# Altium PCB DIY_EINK_Gadget.PcbDoc
Units mm, origin at the board's own origin, x right, y up, seen from the top; angles counter-clockwise.
Board outline 45 x 45 mm, 2 copper layers (Top Layer, Bottom Layer), stack 0.971 mm thick; 65 components, 51 nets, 226 pads, 92 vias.
Unrouted connection lines stored in the file: 13.
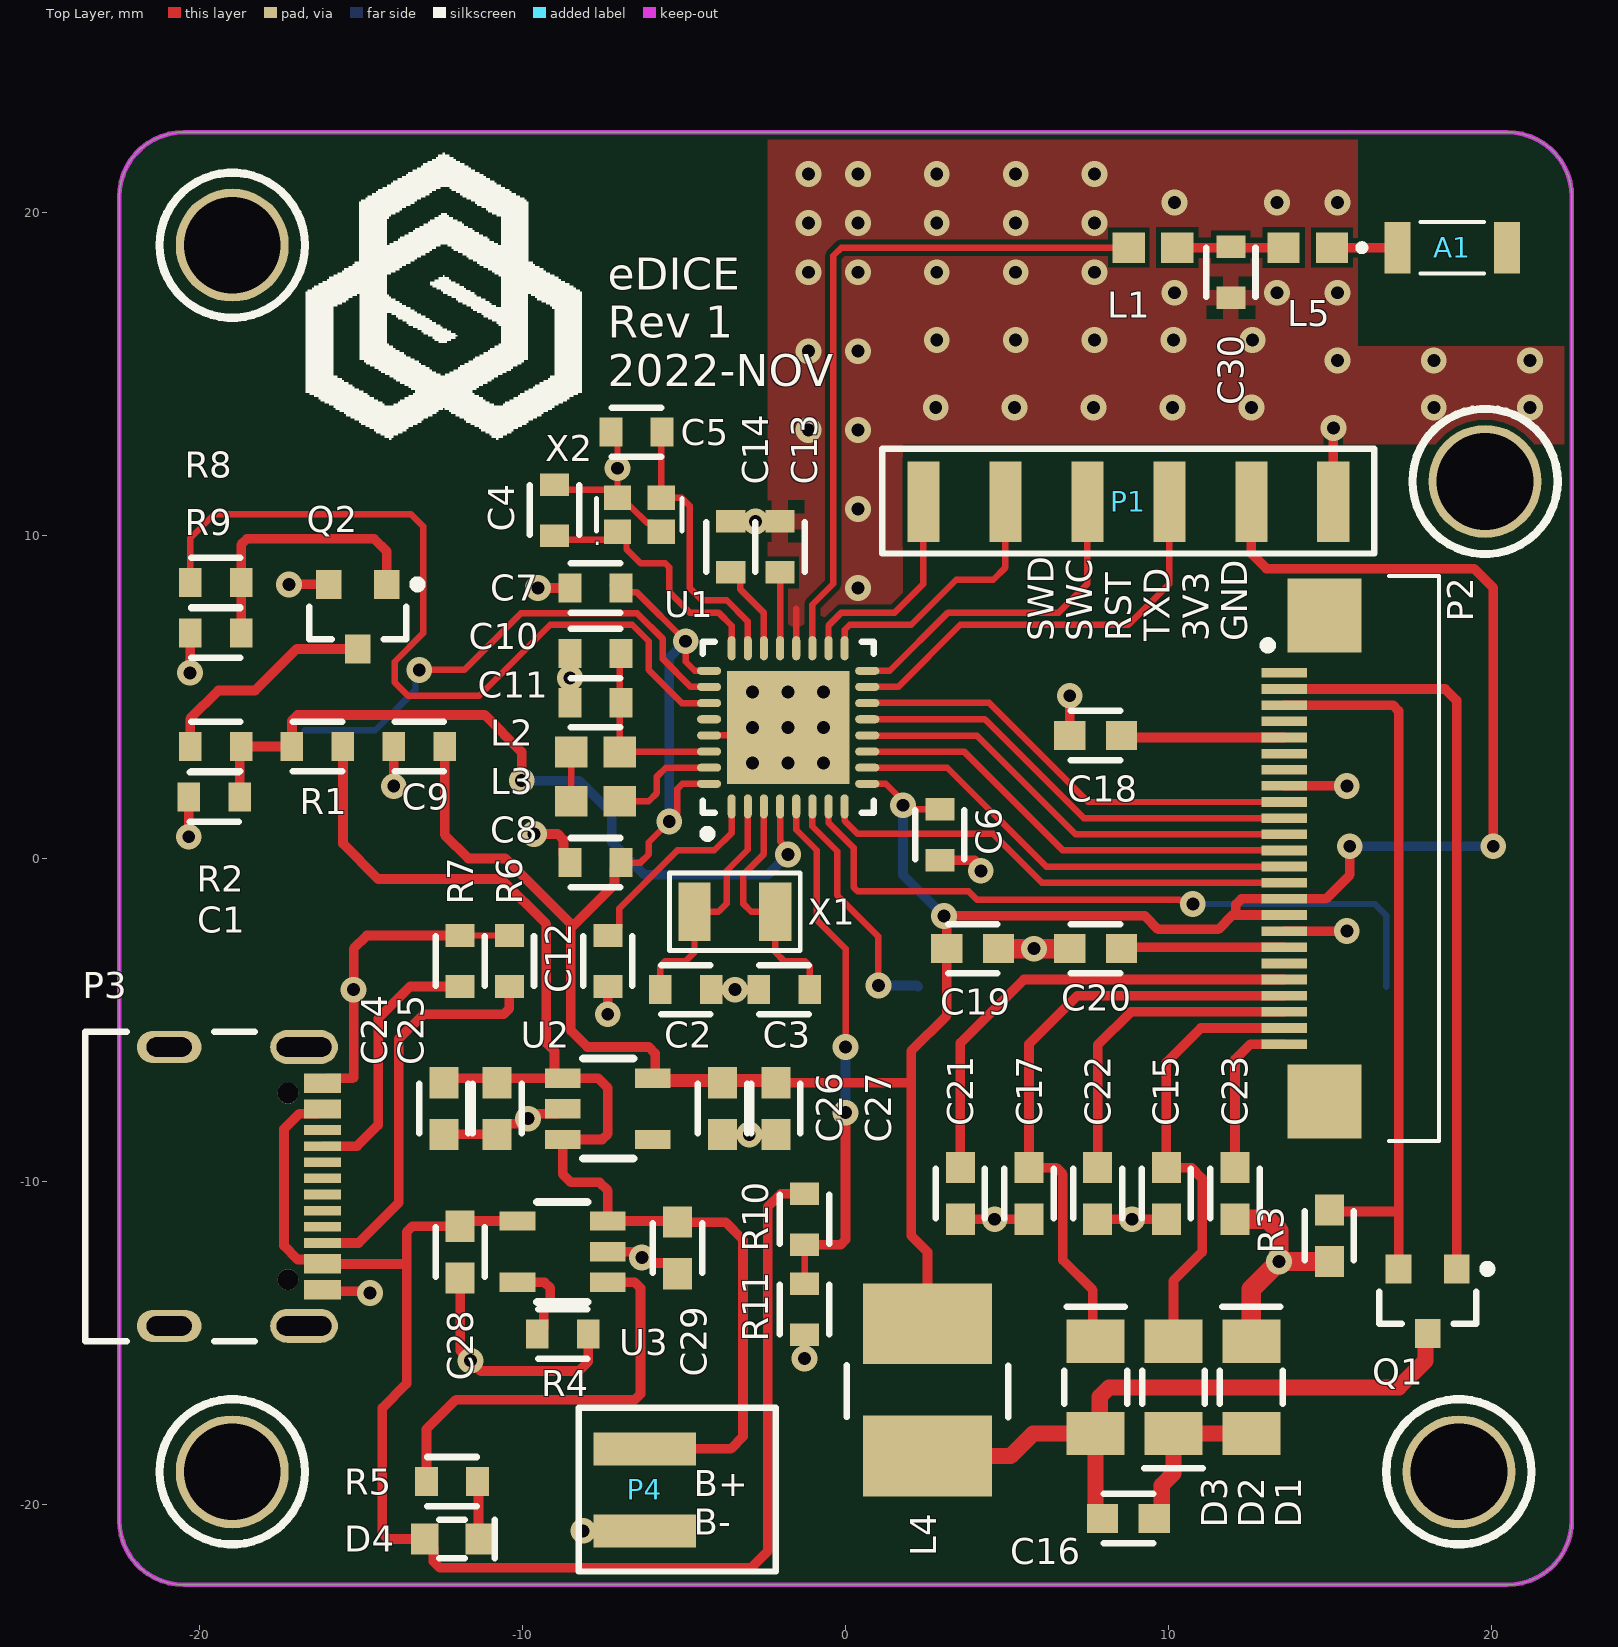
[diagram p0: Top Layer view]
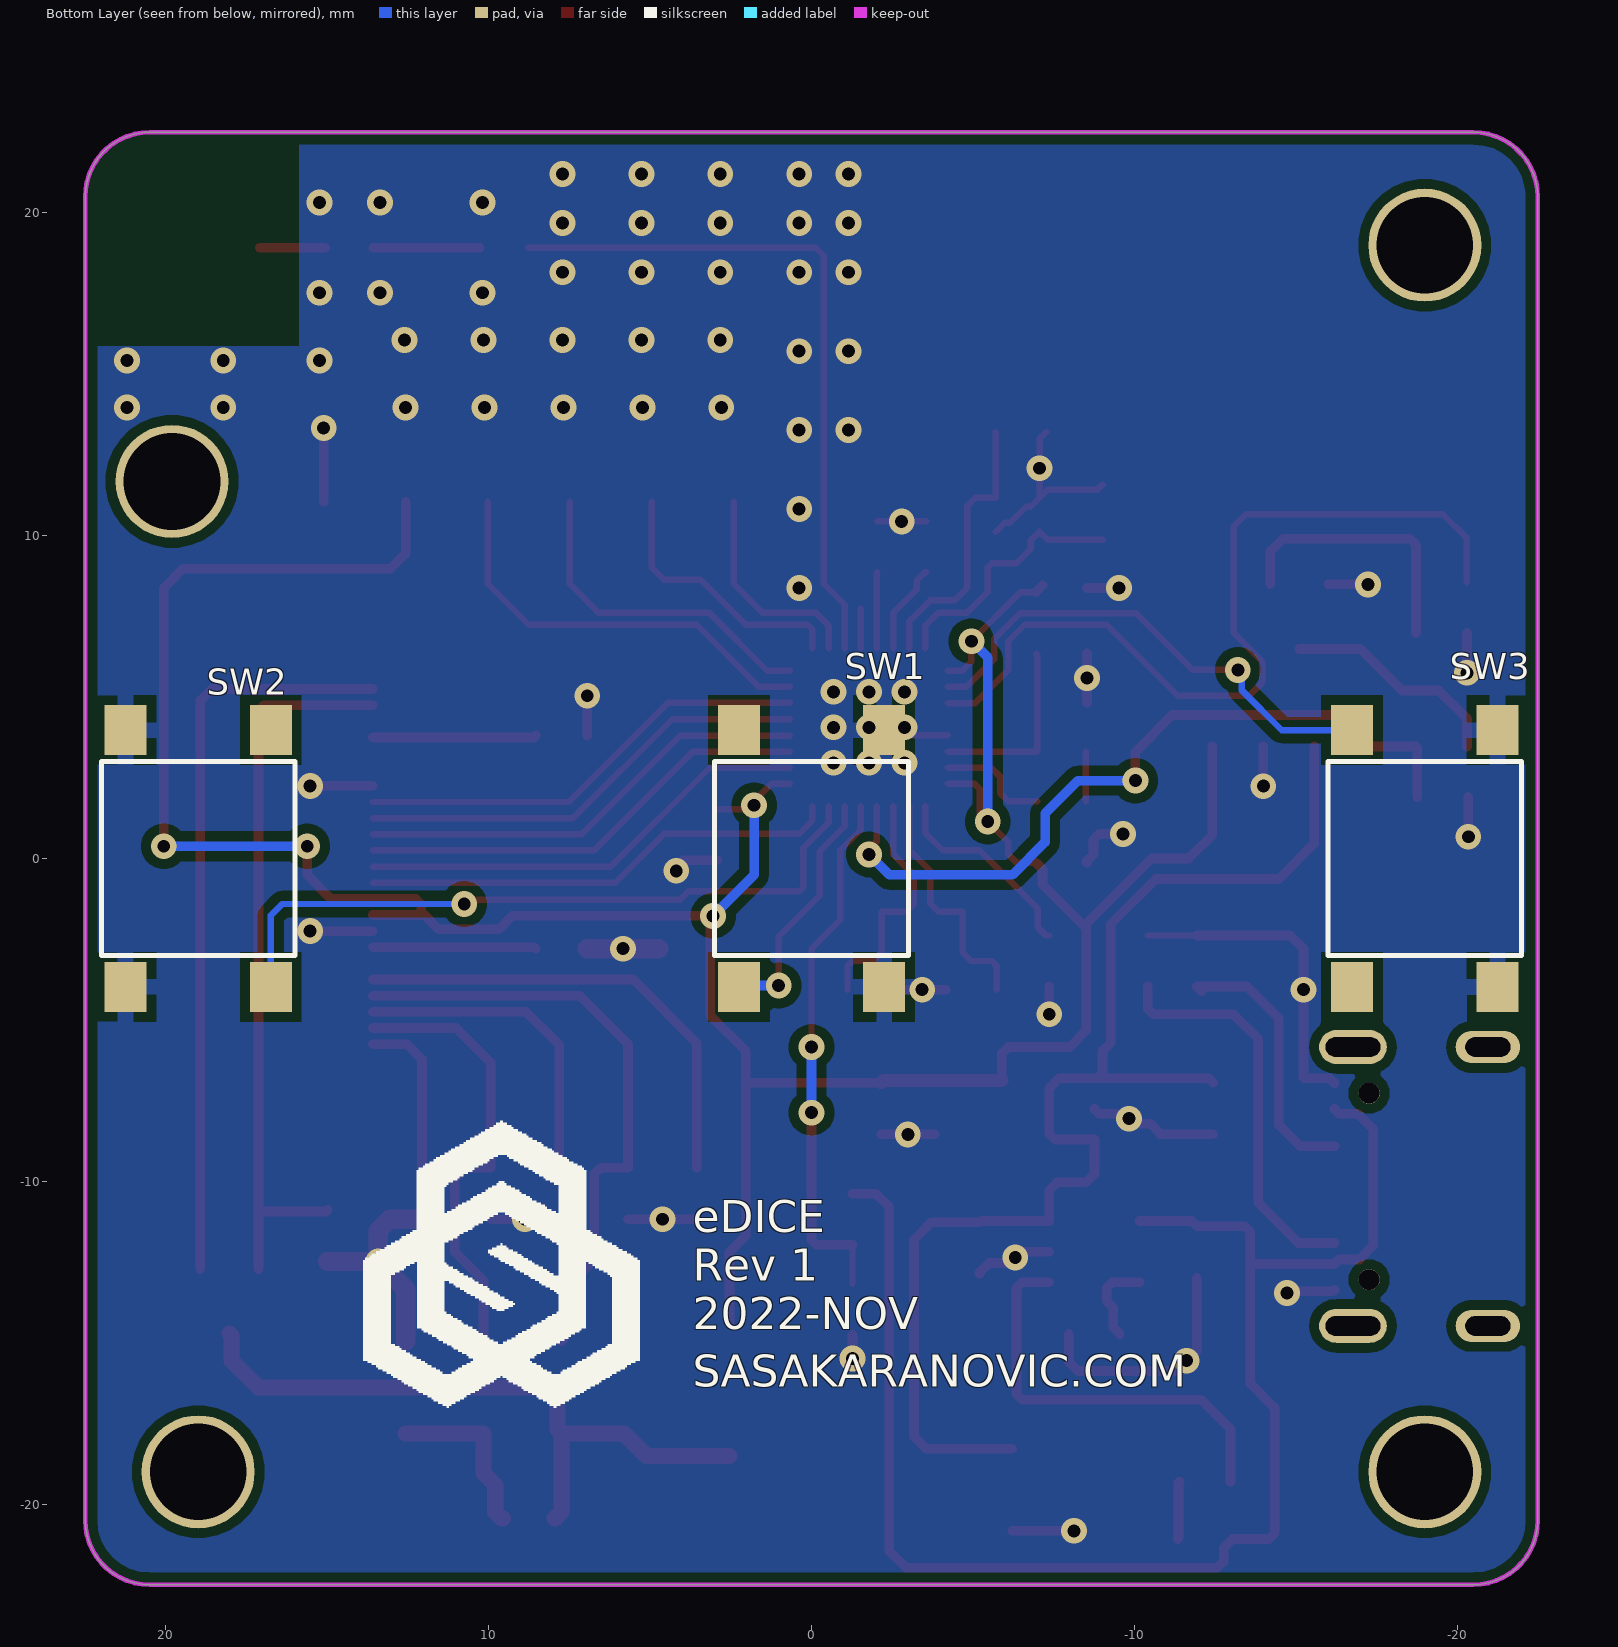
[diagram p1: Bottom Layer view, seen from below]
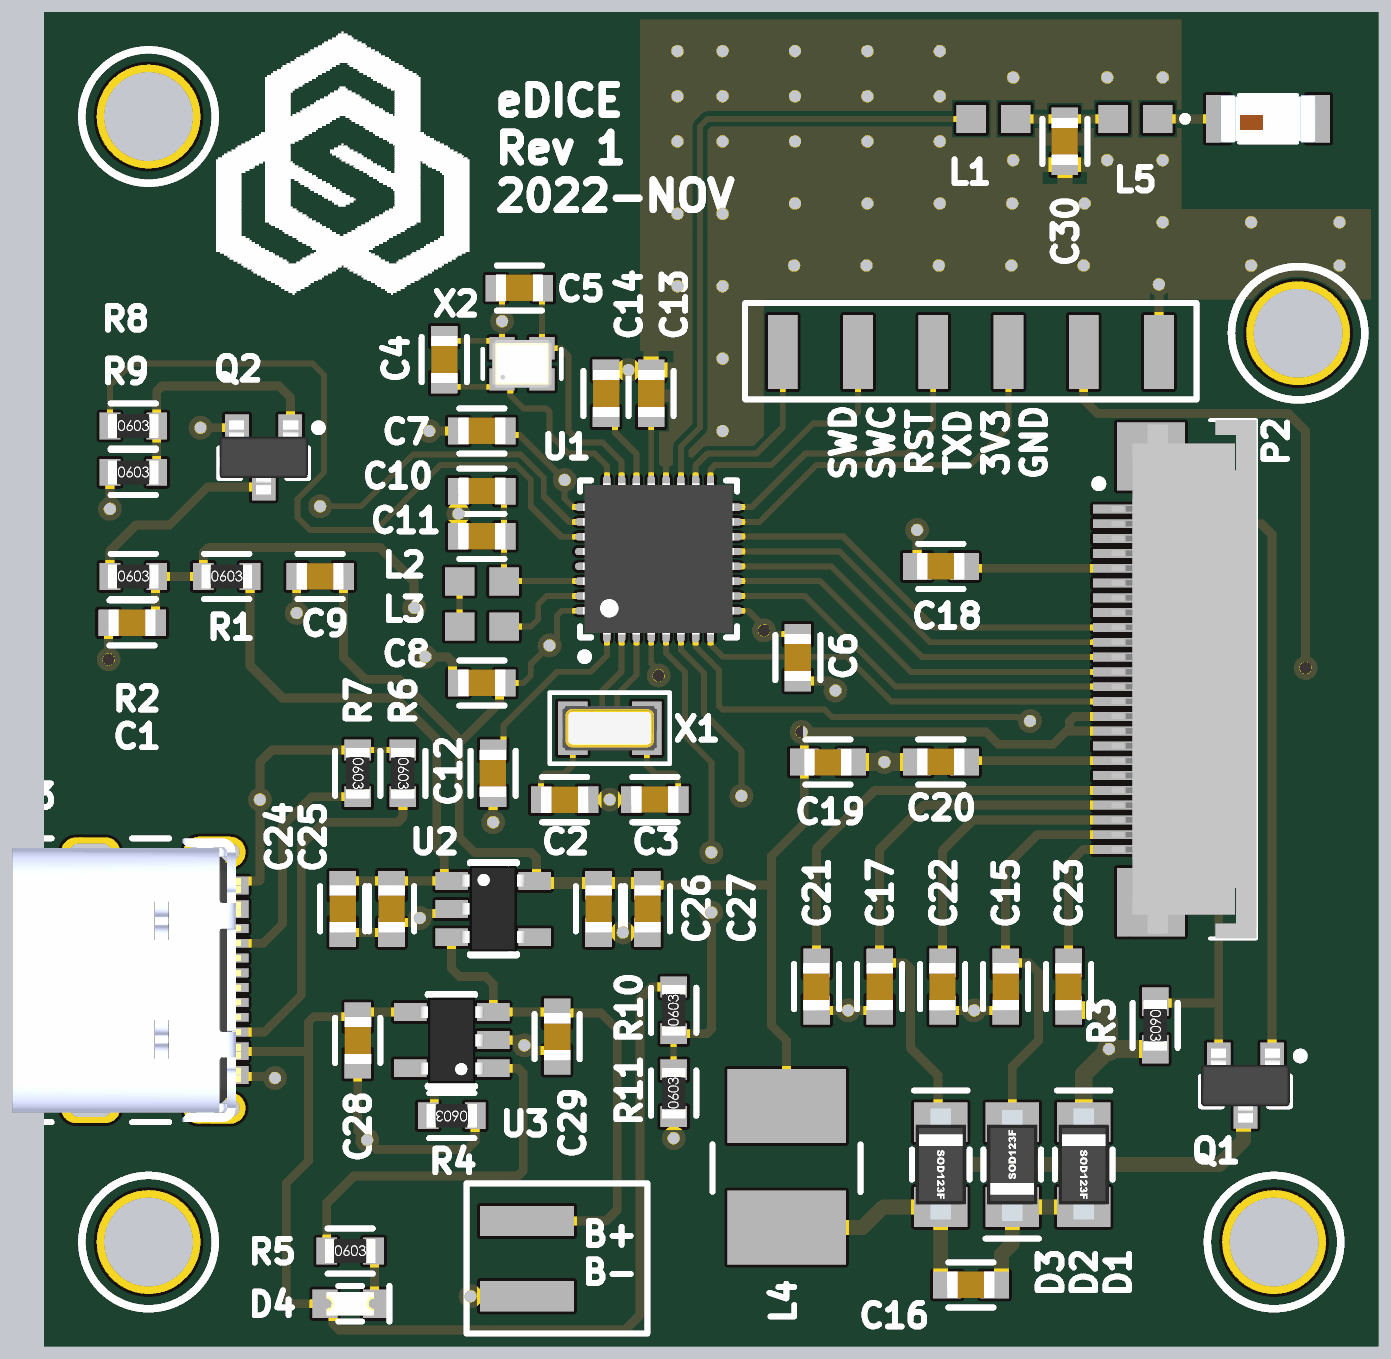
[diagram p2: 3D render of the assembled board from above, using the file's embedded part models]
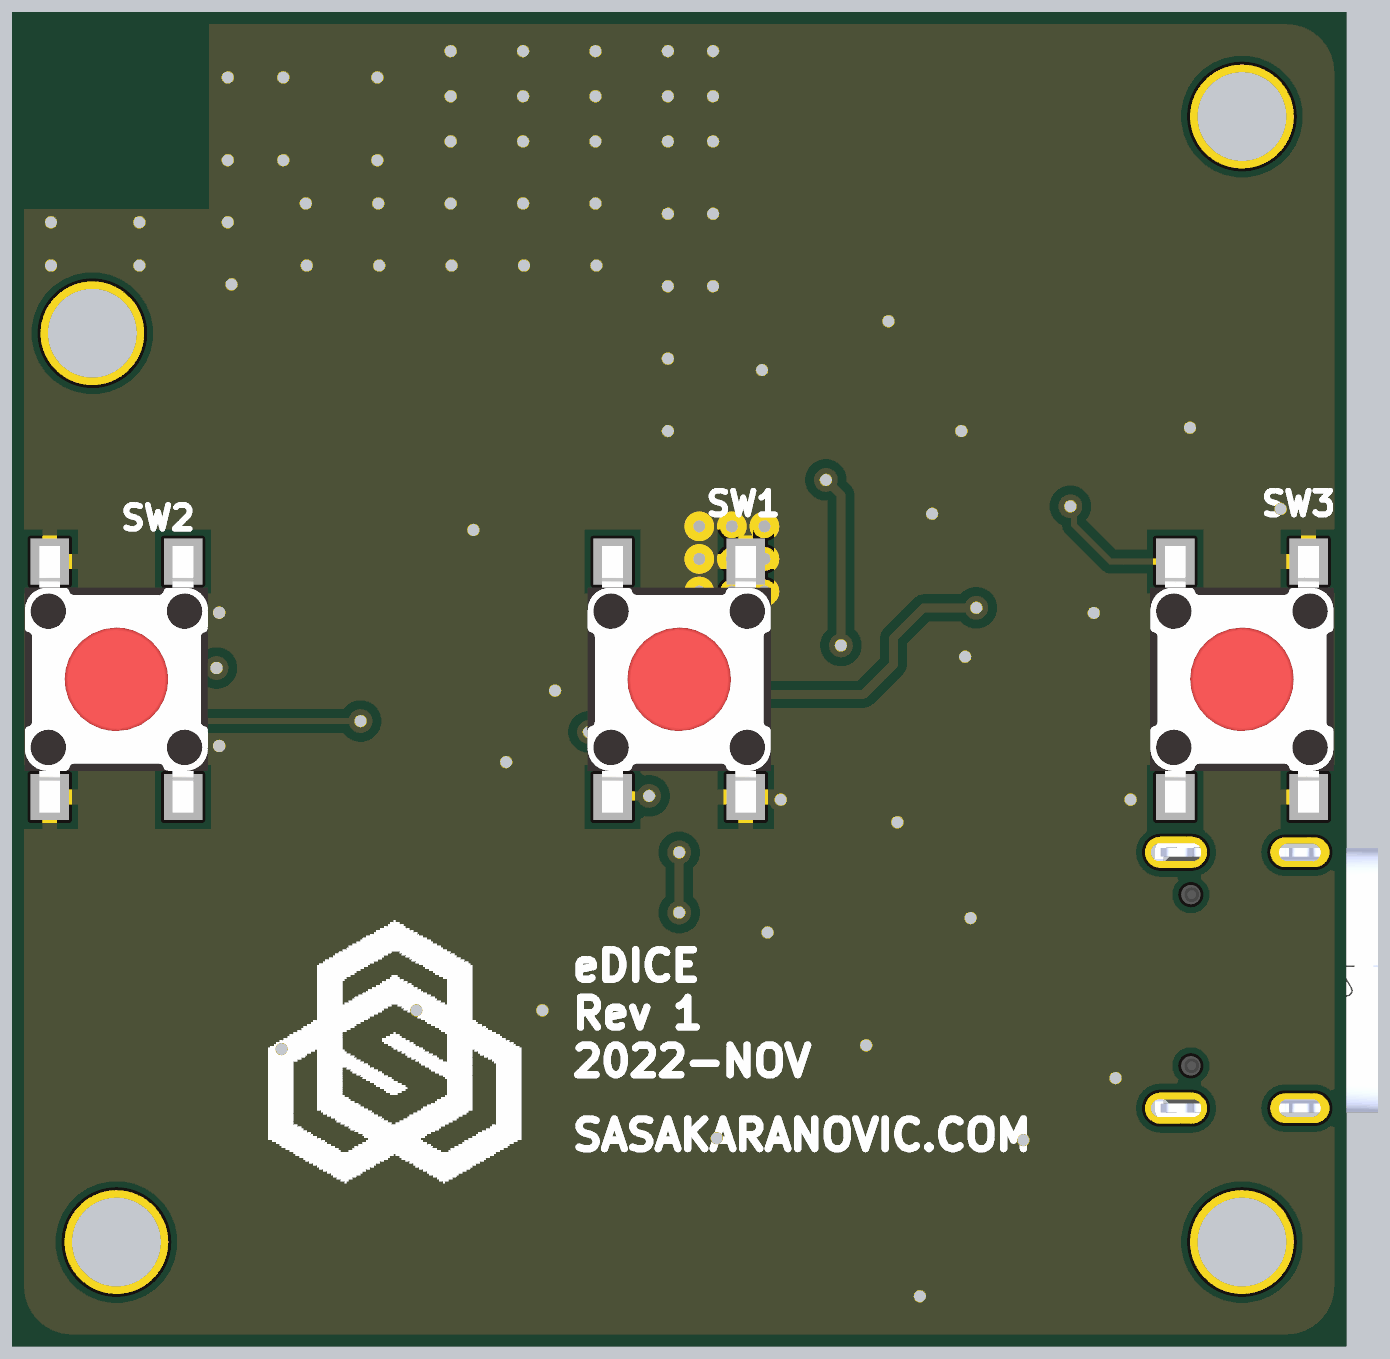
[diagram p3: 3D render of the assembled board from below, using the file's embedded part models]

## Layer stack, top to bottom
Top Solder: solder mask 0.0102, Solder Resist, Dk 3.5
Top Layer: signal copper 0.0356
Dielectric 1: dielectric 0.9, FR-4, Dk 4.8
Bottom Layer: signal copper 0.0356
Bottom Solder: solder mask 0.0102, Solder Resist, Dk 3.5

## Board outline
-20.5,-22.5 cw(c-20.5,-20.5) -22.5,-20.5 -22.5,20.5 cw(c-20.5,20.5) -20.5,22.5 20.5,22.5 cw(c20.5,20.5) 22.5,20.5 22.5,-20.5 cw(c20.5,-20.5) 20.5,-22.5

## Design rules (kind name [scope] priority, off if disabled: settings)
Clearance Clearance_1 [InNamedPolygon('GND_L02_P000')] p1: gap=0.3 ignorepadtopadclearanceinfootprint=FALSE
Clearance [All] p2: gap=0.152 ignorepadtopadclearanceinfootprint=FALSE
Height [All] p1 off: minheight=0 maxheight=25.4 prefheight=12.7
HoleSize [All] p1: absolutevalues=TRUE maxlimit=55 minlimit=0.3 maxpercent=80.000 minpercent=20.000
MinimumSolderMaskSliver [All] p1 off: minsoldermaskwidth=0.254
PolygonConnect [All] p1: thpad.connectstyle=Relief thpad.reliefconductorwidth=0.8 thpad.reliefentries=4 thpad.polygonreliefangle="90 Angle" thpad.airgapwidth=0.5 smdpad.connectstyle=Relief smdpad.reliefconductorwidth=0.5 smdpad.reliefentries=4 smdpad.polygonreliefangle="90 Angle" smdpad.airgapwidth=0.3 via.connectstyle=Direct via.reliefconductorwidth=0.254 via.reliefentries=4 via.polygonreliefangle="90 Angle" via.airgapwidth=0.254
RoutingVias [All] p1: holewidth=0.4 width=0.8 viastyle="Through Hole" minholewidth=0.4 minwidth=0.6 maxholewidth=50 maxwidth=100
SilkToSilkClearance [All] p1 off: silktosilkclearance=0.254
SilkToSolderMaskClearance [IsPad] p1 off: minsilkscreentomaskgap=0.254 clearancetoexposedcopper=TRUE
SolderMaskExpansion [All] p1: expansion=0.102 istentingtop=FALSE
Width [All] p1: maxlimit=50 minlimit=0.15 preferedwidth=0.5
25 further rules are at their usual default settings.

## Components (designator, comment, footprint, x,y, rotation, side; value= is the part's Value field where it differs from the comment)
A1 "2450AT18B100E" 2450AT18B100 18.796,18.923 r0 top
C1 "Cap" "0603 - CAP" -19.558,1.905 r0 top value=DNP
C2 "Cap" "0603 - CAP" -4.953,-4.064 r180 top value=8p
C3 "Cap" "0603 - CAP" -1.905,-4.064 r0 top value=8p
C4 "Cap" "0603 - CAP" -9.017,10.795 r270 top value=8p
C5 "Cap" "0603 - CAP" -6.477,13.208 r0 top value=8p
C6 "Cap" "0603 - CAP" 2.921,0.734 r90 top value=100n
C7 "Cap" "0603 - CAP" -7.747,8.382 r0 top value=100n
C8 "Cap" "0603 - CAP" -7.747,-0.127 r0 top value=100n
C9 "Cap" "0603 - CAP" -13.208,3.472 r0 top value=4.7u
C10 "Cap" "0603 - CAP" -7.747,6.35 r0 top value=DNP
C11 "Cap" "0603 - CAP" -7.747,4.826 r0 top value=1u
C12 "Cap" "0603 - CAP" -7.366,-3.175 r90 top value=100n
C13 "Cap" "0603 - CAP" -2.032,9.652 r270 top value=DNP
C14 "Cap" "0603 - CAP" -3.556,9.652 r270 top value=100p
C15 "Cap" "0603 - CAP HS" 9.938,-10.376 r270 top value=1u
C16 "Cap" "0603 - CAP HS" 8.763,-20.447 r0 top value=1u
C17 "Cap" "0603 - CAP HS" 5.683,-10.376 r270 top value=1u
C18 "Cap" "0603 - CAP HS" 7.747,3.81 r0 top value=1u
C19 "Cap" "0603 - CAP HS" 3.937,-2.794 r180 top value=1u
C20 "Cap" "0603 - CAP HS" 7.747,-2.794 r0 top value=1u
C21 "Cap" "0603 - CAP HS" 3.556,-10.376 r90 top value=1u
C22 "Cap" "0603 - CAP HS" 7.81,-10.376 r90 top value=1u
C23 "Cap" "0603 - CAP HS" 12.065,-10.376 r90 top value=470n
C24 "Cap" "0603 - CAP HS" -12.446,-7.747 r270 top value=4.7u
C25 "Cap" "0603 - CAP HS" -10.795,-7.747 r270 top value=100n
C26 "Cap" "0603 - CAP HS" -3.81,-7.747 r270 top value=4.7u
C27 "Cap" "0603 - CAP HS" -2.159,-7.747 r270 top value=100n
C28 "Cap" "0603 - CAP HS" -11.938,-12.192 r270 top value=4.7u
C29 "Cap" "0603 - CAP HS" -5.207,-12.065 r270 top value=4.7u
C30 "Cap" "0603 - CAP" 11.938,18.161 r90 top value=DNP
D1 "Diode Schotky" SOD123F 12.573,-16.383 r90 top
D2 "Diode Schotky" SOD123F 10.16,-16.383 r270 top
D3 "Diode Schotky" SOD123F 7.747,-16.383 r90 top
D4 "LED" "0603 Diode" -12.192,-21.082 r0 top
L1 "Inductor" 0603_IND 9.525,18.923 r0 top value=0R
L2 "Inductor" 0603_IND -7.747,3.302 r180 top value=10uH
L3 "Inductor" 0603_IND -7.747,1.778 r0 top value=3.9nH
L4 "Inductor" IND_5050 2.54,-16.51 r270 top value=47uH
L5 "Inductor" 0603_IND 14.32,18.923 r0 top value=0R
P1 "ICSP" "Header 6x1 M - 90Deg - SMT" 8.763,11.049 r0 top locked
P2 "HINK-E013A02" SFV24R-1STE1HLF 13.589,0 r270 top locked
P3 "USB-C Recepticle" GCT_USB4105-GF-A -20.955,-10.16 r270 top locked
P4 "Battery Connector" "Header 2x1 SMD" -6.223,-18.288 r270 top
Q1 "DMN62D0U-13" SOT90P240X100-3N 18.034,-13.716 r270 top
Q2 "DMN62D0U-13" SOT90P240X100-3N -15.113,7.493 r270 top
R1 "Res" 0603 -16.362,3.472 r0 top value=DNP
R2 "Res" 0603 -19.515,3.472 r0 top value=DNP
R3 "Res" "0603 - HS" 14.986,-11.684 r270 top value=2R2
R4 "Res" 0603 -8.763,-14.732 r180 top value=22K
R5 "Res" 0603 -12.192,-19.304 r0 top value=470R
R6 "Res" 0603 -10.414,-3.175 r270 top value=5K1
R7 "Res" 0603 -11.938,-3.175 r270 top value=5K1
R8 "Res" 0603 -19.515,8.552 r0 top value=DNP
R9 "Res" 0603 -19.515,6.985 r0 top value=DNP
R10 "Res" 0603 -1.27,-11.176 r90 top value=68K
R11 "Res" 0603 -1.27,-13.97 r90 top value=100K
SW1 "SWITCH TACTILE SPST-NO 0.05A 12V" PTS645 0,0 r90 bottom
SW2 "SWITCH TACTILE SPST-NO 0.05A 12V" PTS645 19,0 r270 bottom
SW3 "SWITCH TACTILE SPST-NO 0.05A 12V" PTS645 -19,0 r90 bottom
U1 "NRF52810-QCAA-R" QFN50P500X500X100_HS-33N -1.778,4.064 r90 top
U2 "TPS7A0333DBVR" SOT-23-5 -7.366,-7.747 r0 top
U3 "MCP73832T" SOT-23-5 -8.763,-12.192 r180 top
X1 "32.768KHz" XTAL-2LEAD-3215 -3.429,-1.651 r0 top
X2 "32.00MHz" XTAL-4LEAD-2016 -6.39,10.651 r0 top

## Footprints (in the part's own frame and the unit in brackets; to place one, negate y for a bottom-side part, rotate by r counter-clockwise, add the part's x,y. Pads: shape width x height; smd on the part's side, far side on the other; paste and mask are expansions set on the pad)
0603 [mm]
  rect 0.7x0.9 smd: 1(-0.79,0) 2(0.79,0)
  silkscreen extent -0.76,-0.76 0.76,0.76, body extent -0.85,-0.4 0.85,0.4, height 0.56
"0603 - CAP" [mm]
  rect 0.7x0.9 smd: 1(-0.79,0) 2(0.79,0)
  silkscreen extent -0.76,-0.76 0.76,0.76, body extent -0.8,-0.44 0.8,0.46, height 0.8
"0603 - CAP HS" [mm]
  rect 0.965x0.9 smd: 1(-0.8,0) 2(0.8,0)
  silkscreen extent -0.76,-0.76 0.76,0.76, body extent -0.8,-0.44 0.8,0.46, height 0.8
"0603 - HS" [mm]
  rect 0.965x0.9 smd: 1(-0.8,0) 2(0.8,0)
  silkscreen extent -0.76,-0.76 0.76,0.76, body extent -0.85,-0.4 0.85,0.4, height 0.56
"0603 Diode" [mm] "0603 Package for Diode"
  rect 0.85x0.95 smd: A(-0.85,0) K(0.85,0)
  silkscreen extent -0.4,-0.6 1.32,0.6, body extent -0.8,-0.4 0.8,0.4, height 0.7
0603_IND [mm] "Chip Inductor, 2-Leads, Body 1.60x0.80mm, IPC Medium Density"
  rect 1x0.95 smd: 1(-0.75,0) 2(0.75,0)
  body extent -0.85,-0.45 0.85,0.45, height 0.9
2450AT18B100 [mm]
  rect 0.8x1.6 smd: 1(-1.7,0) 2(1.7,0)
  silkscreen extent -2.9,-0.8 0.98,0.8, body extent -1.6,-0.8 1.6,0.8, height 1.4
GCT_USB4105-GF-A [mm]
  oval 1x2 hole 0.6 slot 1.4 at 90 deg: 15(-4.32,0) 17(4.32,0)
  oval 1.05x2.1 hole 0.6 slot 1.7 at 90 deg: 16(-4.32,4.18) 18(4.32,4.18)
  rect 0.6x1.15 smd: A1/B12(-3.2,4.755) A4/B9(-2.4,4.755) B1/A12(3.2,4.755) B4/A9(2.4,4.755)
  rect 0.3x1.15 smd: A5(-1.25,4.755) A6(-0.25,4.755) A7(0.25,4.755) A8(1.25,4.755) B5(1.75,4.755) B6(0.75,4.755) B7(-0.75,4.755) B8(-1.75,4.755)
  round 0.65 hole 0.65 unplated: ""(-2.89,3.68) ""(2.89,3.68)
  silkscreen extent -4.79,-2.6 4.79,2.65, body extent -4.79,-2.63 4.79,5.08, height 3.31
"Header 2x1 SMD" [mm] "Connector; Header; 2 Position"
  rect 1.02x3.17 smd: 1(0,0) 2(2.54,0)
  silkscreen extent -1.27,-2.04 3.8,4.06
"Header 6x1 M - 90Deg - SMT" [mm] "Connector; Header; 6 Position, Right Angle, SMT"
  rect 1x2.5 smd: 1(-6.35,0) 2(-3.81,0) 3(-1.27,0) 4(1.27,0) 5(3.81,0) 6(6.35,0)
  silkscreen extent -7.62,-1.6 7.62,1.65
IND_5050 [mm]
  rect 2.5x4 smd: 1(-2.1,0) 2(2,0)
  silkscreen extent -0.81,-2.5 0.8,2.5, body extent -2.5,-2.5 2.5,2.5, height 4
PTS645 [mm] "6mm Tact Switch"
  rect 1.55x1.3 smd: 1(-3.975,2.25) 2(3.975,2.25) 3(-3.975,-2.25) 4(3.975,-2.25)
  silkscreen extent -3,-3 3,3, body extent -4.5,-3.1 4.5,3.1, height 4.3
QFN50P500X500X100_HS-33N [mm] "QFN, 32-Leads, Body 5.00x5.00mm, Pitch 0.50mm, Thermal Pad 3.50x3.80mm, IPC Medium Density"
  oval 0.75x0.25 smd: 1(-2.45,1.75) 2(-2.45,1.25) 3(-2.45,0.75) 4(-2.45,0.25) 5(-2.45,-0.25) 6(-2.45,-0.75) 7(-2.45,-1.25) 8(-2.45,-1.75) 17(2.45,-1.75) 18(2.45,-1.25) 19(2.45,-0.75) 20(2.45,-0.25) 21(2.45,0.25) 22(2.45,0.75) 23(2.45,1.25) 24(2.45,1.75)
  oval 0.25x0.75 smd: 9(-1.75,-2.45) 10(-1.25,-2.45) 11(-0.75,-2.45) 12(-0.25,-2.45) 13(0.25,-2.45) 14(0.75,-2.45) 15(1.25,-2.45) 16(1.75,-2.45) 25(1.75,2.45) 26(1.25,2.45) 27(0.75,2.45) 28(0.25,2.45) 29(-0.25,2.45) 30(-0.75,2.45) 31(-1.25,2.45) 32(-1.75,2.45)
  rect 3.5x3.8 smd: 33(0,0)
  silkscreen extent -3.42,-2.65 2.65,2.65, body extent -2.55,-2.55 2.55,2.55, height 1
SFV24R-1STE1HLF [mm]
  rect 0.3x1.4 smd: 1(-5.75,0) 1(-5.75,0) 2(-5.25,0) 3(-4.75,0) 4(-4.25,0) 5(-3.75,0) 6(-3.25,0) 7(-2.75,0) 8(-2.25,0) 9(-1.75,0) 10(-1.25,0) 11(-0.75,0) 12(-0.25,0) 13(0.25,0) 14(0.75,0) 15(1.25,0) 16(1.75,0) 17(2.25,0) 18(2.75,0) 19(3.25,0) 20(3.75,0) 21(4.25,0) 22(4.75,0) 23(5.25,0) 24(5.75,0)
  rect 2.3x2.3 smd: ""(-7.525,1.25) ""(7.525,1.25)
  silkscreen extent -8.75,3.25 8.75,4.8, body extent -8.75,-0.07 8.75,4.83, height 1.9
SOD123F [mm]
  rect 1.34x1.8 smd: A(-1.43,0) K(1.43,0)
  silkscreen extent -0.51,-0.97 2.5,0.97, body extent -1.85,-0.85 1.9,0.85, height 1.2
SOT90P240X100-3N [mm] "SOT23, 3-Leads, Body 2.90x2.40mm, Pitch 0.90mm, IPC Medium Density"
  rect 0.9x0.8 smd: 1(-1,0.9) 2(-1,-0.9) 3(1,0)
  silkscreen extent -1.12,-1.5 0.7,1.98, body extent -1.25,-1.5 1.25,1.5, height 1
SOT-23-5 [mm]
  rect 1.1x0.6 smd: 1(-1.4,0.94) 2(-1.4,-0.01) 3(-1.4,-0.96) 4(1.4,-0.96) 5(1.4,0.94)
  silkscreen extent -0.76,-1.55 0.79,1.55, body extent -1.4,-1.45 1.4,1.45
XTAL-2LEAD-3215 [mm]
  rect 1x1.8 smd: 1(-1.25,0) 2(1.25,0)
  silkscreen extent -2.02,-1.2 2.02,1.2, body extent -1.6,-0.75 1.6,0.75, height 0.8
XTAL-4LEAD-2016 [mm]
  rect 0.85x0.75 smd: 1(-0.675,-0.525) 2(0.675,-0.525) 3(0.675,0.525) 4(-0.675,0.525)
  silkscreen extent -1.33,-0.5 1.33,0.5, body extent -1,-0.8 1,0.8, height 0.7

## Part data
A1: "2.4GHz - Chip RF Antenna 2.4GHz ~ 2.5GHz 0.5dBi Solder Surface Mount", Distributor Part Number=712-1006-1-ND, Manufacturer="Johanson Technology Inc.", Distributor=DigiKey, Manufacturer Part Number=2450AT18B100E
C1 C2 C3 C4 C5 C6 C7 C8 C9 C10 C11 C12 C13 C14 C15 C16 C17 C18 C19 C20 C21 C22 C23 C24 C25 C26 C27 C28 C29 C30: "Capacitor"
D4: "Typical RED GaAs LED", PackageDescription="LED; 2 Leads", PackageReference=LED-1
P1: library part "Header 6", "Header, 6-Pin"
P2: library part SFV24R-1STE1HLF
P3: "CONN RCPT USB2.0 TYPEC 5A", Distributor Part Number=2073-USB4105-GF-ACT-ND, Manufacturer=GCT, Manufacturer Part Number=USB4105-GF-A, Distributor=DigiKey
P4: library part "Header 2", "Header, 2-Pin"
Q1 Q2: "MOSFET N-CH 60V 0.38A", Distributor Part Number=DMN62D0U-13DICT-ND, Manufacturer="Diodes Incorporated", Distributor=DigiKey, Manufacturer Part Number=DMN62D0U-13
R1 R2 R3 R4 R5 R6 R7 R8 R9 R10 R11: "Resistor", PackageDescription="Axial Device, Thru-Hole; 2 Leads; 0.3 in Pin Spacing", PackageReference=AXIAL-0.3
  R3: LatestRevisionDate=17-Jul-2002, LatestRevisionNote="Re-released for DXP Platform.", Published=8-Jun-2000, Publisher="Altium Limited"
SW1 SW2 SW3: library part "PTS645SL50SMTR92 LFS", Distributor Part Number=CKN9088CT-ND, Manufacturer=C&K, Distributor=DigiKey, Manufacturer Part Number="PTS645SL50SMTR92 LFS"
U1: "IC RF TxRx + MCU Bluetooth Bluetooth v5.0 2.4GHz 32-VFQFN Exposed Pad", Distributor Part Number=1490-NRF52810-QCAA-RCT-ND, Manufacturer="Nordic Semiconductor ASA", Distributor=DigiKey, Manufacturer Part Number=NRF52810-QCAA-R
U2: library part NCP161ASN330T1G, "Linear Voltage Regulator IC  1 Output  450mA SOT-23-5", Distributor Part Number=NCP161ASN330T1GOSCT-ND, Manufacturer="ON Semiconductor", Distributor=DigiKey, Manufacturer Part Number=NCP161ASN330T1G
U3: library part MCP73832, "1xLi-Ion char, 0.5A, 4.2V reg, 3.75-6V"
X1: library part XTAL-32.768KHz-SC32S-7PF20PPM, "32.768 kHz ±20ppm Crystal 7pF 70 kOhms 2-SMD, No Lead", Distributor Part Number=XC3067CT-ND, Manufacturer="ECS Inc.", Manufacturer Part Number=ECS-320-8-37B-CKY-TR, Distributor=DigiKey
X2: library part XTAL-32MHz-ECS-320-8-37B-CKY-TR, "32 MHz ±10ppm Crystal 8pF 50 Ohms 4-SMD, No Lead", Distributor Part Number=XC3067CT-ND, Manufacturer="ECS Inc.", Manufacturer Part Number=ECS-320-8-37B-CKY-TR, Distributor=DigiKey

## Free pads (board coordinates)
  round 3.5 hole 3: 1(-19,-19) 1(-19,19) 1(19,-19) 1(19.812,11.684)

## Via types
v1: diameter 0.8, hole 0.4, Top Layer to Bottom Layer, tented both sides, 83 vias
v2: diameter 0.8, hole 0.4, Top Layer to Bottom Layer, 9 vias

## Nets (pads, with @x,y where several pads share a name; then routed paths per layer and width w, separated by ;. In a path a pad name is that pad's centre, name@x,y a point inside that pad or via, vN(x,y) a via of type N, cw(c..) or ccw(c..) an arc to the next point about the centre after c; other vN are vias at no path point)
3V3: C6.2 C7.2 C8.2 C9.2 C19.2 C26.1 C27.1 L4.1 P1.5 P2.15 P2.16 U1.9 U1.25 U1.32 U2.5 | length 97.9
  Top Layer w0.2: C8.2 -6.35,-0.127 -6.096,0.127 -6.096,0.508 v1(-5.461,1.143) -5.207,1.397 -5.207,2.159 -5.052,2.314 U1.32 ; C7.2@-6.957,8.255 -6.477,8.255 v1(-4.953,6.731) -4.953,6.096 -4.675,5.818 -4.232,5.818 U1.25 ; U1.9 1.242,2.314 2.032,1.524 C6.2
  Top Layer w0.3: C9.2 -12.418,0.734 -11.684,0 -10.541,0 -8.509,-2.032 -8.509,-2.159 ; C7.2@-7.157,8.455 C7.2@-6.957,8.255 ; C8.2 -7.157,-0.327 -7.157,-0.807 -8.509,-2.159 ; U2.5@-5.896,-6.877 -5.896,-6.042 -6.096,-5.842 -8.001,-5.842 -8.509,-5.334 -8.509,-2.159 ; C27.1 1.994,-6.947 ; L4.1 2.54,-12.192 2.032,-11.684 2.032,-5.963 3.137,-4.858 C19.2 3.137,-2.053 3.048,-1.964 v1(3.048,-1.778) 9.271,-1.778 9.687,-2.194 11.55,-2.194 11.994,-1.75 12.093,-1.75 ; P1.5 12.573,9.447 13.042,8.977 19.471,8.977 20.066,8.382 v1(20.066,0.381) ; P2.16 12.093,-1.75 ; v1(15.621,0.381) 15.621,-0.508 14.879,-1.25 P2.15 12.269,-1.25 12.093,-1.426 12.093,-1.75
  Top Layer w0.4: U2.5@-5.896,-6.877 -2.229,-6.877 C27.1
  Bottom Layer w0.3: v1(-5.461,1.143) -5.461,6.223 v1(-4.953,6.731) ; v1(1.778,1.651) 1.778,-0.508 v1(3.048,-1.778) ; v1(15.621,0.381) v1(20.066,0.381)
ADC_ON: R8.1 U1.27 | length 26.6
  Top Layer w0.2: R8.1 -20.305,9.921 -19.558,10.668 -13.462,10.668 -13.081,10.287 -13.081,6.985 -13.97,6.096 -13.97,5.454 -13.554,5.038 -11.345,5.038 -9.144,7.239 -6.604,7.239 -6.096,6.731 -6.096,5.842 -5.068,4.814 U1.27
ADC_VBAT: C1.2 R1.1 R2.2 U1.4 | length 24.3
  Top Layer w0.2: R2.2@-18.768,3.429 R2.2 ; U1.4 -2.028,0.539 -1.778,0.289 v1(-1.778,0.127)
  Top Layer w0.3: C1.2 R2.2@-18.768,3.429 ; R2.2 R1.1 -17.151,4.269 -16.976,4.445 -11.176,4.445 -10.033,3.302 v1(-10.033,2.413)
  Bottom Layer w0.3: v1(-10.033,2.413) -8.255,2.413 -7.239,1.397 -7.239,0.508 -6.223,-0.508 -2.413,-0.508 v1(-1.778,0.127)
ADC_VUSB: R10.1 R11.2 U1.5 | length 16.6
  Top Layer w0.2: U1.5 -1.528,0.893 -0.889,0.254 -0.889,-1.905 0,-2.794 v1(0,-5.842) ; R11.2 R10.1
  Top Layer w0.3: R10.1 -0.155,-11.966 0,-11.811 v1(0,-7.874)
  Bottom Layer w0.3: v1(0,-7.874) v1(0,-5.842)
BUSY: P2.9 U1.14 | length 14.2
  Top Layer w0.2: U1.14@0.672,4.826 4.445,4.826 7.521,1.75 P2.9
DATA/nCMD: P2.11 U1.12 | length 14.2
  Top Layer w0.2: U1.12@0.672,3.81 4.064,3.81 7.124,0.75 P2.11
GDR: P2.2 Q1.1 | length 23.1
  Top Layer w0.3: P2.2 18.577,5.25 18.934,4.893 Q1.1
GND: C1.1 C2.1 C3.1 C4.1 C5.1 C6.1 C7.1 C8.1 C9.1 C10.1 C11.1 C12.1 C13.1 C14.1 C15.2 C17.2 C18.1 C19.1 C20.1 C21.1 C22.1 C23.1 C24.2 C25.2 C26.2 C27.2 C28.2 C29.2 C30.1 D1.K P1.6 P2.8 P2.17 P3.A1/B12 P3.B1/A12 P4.2 Q2.2 R3.2 R4.1 R6.1 R7.1 R9.1 R11.1 SW1.3 SW1.4 SW2.3 SW2.4 SW3.3 SW3.4 U1.20 U1.29 U1.33 U2.2 U3.2 X2.2 X2.4 | length 73.9
  Top Layer w0.2: R7.1 R6.1 ; C4.1 -8.862,11.43 -7.319,11.43 X2.4 ; C5.1 -7.065,13.006 v1(-7.065,12.091) X2.4 ; X2.2 -5.99,10.401 -6.15,10.401 -6.65,10.901 -6.79,10.901 X2.4 ; U1.29 -3.128,3.814 v2(-2.878,4.064) ; C14.1 C13.1 ; U1.20 -1.528,7.743
  Top Layer w0.3: v1(-20.348,0.673) C1.1 ; v1(-20.305,5.753) R9.1 ; v1(-17.245,8.493) Q2.2 ; P3.B1/A12 -16.149,-13.411 -14.783,-13.411 v1(-14.732,-13.462) v1@-14.732,-13.335 ; P3.A1/B12 -16.05,-6.81 -15.266,-6.81 -15.24,-6.784 v1(-15.24,-4.064) -15.24,-2.794 -14.831,-2.385 R7.1 ; v1(-13.998,2.24) C9.1 ; C24.2 C25.2 -10.795,-8.515 -10.495,-8.214 -9.992,-8.214 -9.685,-7.907 -8.916,-7.907 U2.2 ; C28.2 -11.938,-15.24 -11.303,-15.875 -8.255,-15.875 -7.973,-15.593 R4.1 ; v1@-9.647,0.757 -8.913,0.757 -8.737,0.581 -8.737,0.129 -8.509,-0.099 C8.1 ; v1(-9.525,8.382) C7.1 ; C11.1 C10.1 ; v1(-8.128,-20.828) P4.2 ; v1(-7.366,-4.826) C12.1 ; U3.2 -6.487,-12.182 -6.137,-12.532 -5.507,-12.532 -5.207,-12.833 C29.2 ; C2.1 C3.1 ; C26.2 C27.2 ; v1(-1.27,-15.494) R11.1 ; C6.1 3.993,-0.056 4.191,-0.254 v1(4.191,-0.381) ; C21.1 C17.2 ; C18.1 v1(6.947,5.042) ; C22.1 C15.2 ; P2.17 v1(15.53,-2.25) ; P2.8 v1(15.53,2.25) ; P1.6 v1(15.113,13.335)
  Top Layer w0.6: C19.1 C20.1 ; C23.1 13.073,-11.176 13.424,-11.527 v1(13.424,-12.484) ; D1.K 12.573,-13.335 v1(13.424,-12.484) ; R3.2 v1(13.424,-12.484)
  other v1: -11.62,-15.557 -6.312,-12.357 4.62,-11.176 8.874,-11.176 -2.984,-8.547 -9.839,-8.061 -3.429,-4.064 5.842,-2.794 -9.652,0.762 -8.537,5.588 0.381,8.382 -2.794,10.442 0.381,10.827 -1.143,13.271 0.381,13.271 2.794,13.97 5.239,13.97 7.683,13.97 10.128,13.97 12.573,13.97 18.224,13.97 21.209,13.97 15.24,15.43 18.224,15.43 21.209,15.43 -1.143,15.716 0.381,15.716 2.826,16.066 5.271,16.066 7.715,16.066 10.16,16.066 12.605,16.066 10.192,17.526 13.367,17.526 15.24,17.526 -1.143,18.161 0.381,18.161 2.826,18.161 5.271,18.161 7.715,18.161 -1.143,19.685 0.381,19.685 2.826,19.685 5.271,19.685 7.715,19.685 10.192,20.32 13.367,20.32 15.24,20.32 -1.143,21.209 0.381,21.209 2.826,21.209 5.271,21.209 7.715,21.209
  other v2: -2.878,2.964 -1.778,2.964 -0.678,2.964 -1.778,4.064 -0.678,4.064 -2.878,5.164 -1.778,5.164 -0.678,5.164
nCS: P2.12 U1.11 | length 14.2
  Top Layer w0.2: U1.11 3.671,3.314 6.735,0.25 P2.12
NetA1_1: A1.1 L5.2 | length 2
  Top Layer w0.3: L5.2 A1.1
NetC2_2: C2.2 U1.2 X1.1 | length 7.6
  Top Layer w0.2: C2.2 -5.743,-3.33 -5.588,-3.175 -4.953,-3.175 -4.679,-2.901 X1.1 -3.937,-1.651 -3.683,-1.397 -3.683,-0.381 -3.028,0.274 U1.2
NetC3_2: C3.2 U1.3 X1.2 | length 7.6
  Top Layer w0.2: U1.3 -2.528,0.139 -3.175,-0.508 -3.175,-1.397 -2.921,-1.651 X1.2 -2.179,-2.901 -1.905,-3.175 -1.27,-3.175 -1.115,-3.33 C3.2
NetC4_2: C4.2 U1.24 X2.1 | length 8.1
  Top Layer w0.2: C4.2@-9.017,9.878 -7.313,9.878 X2.1 -7.061,10.126 -6.786,9.851 -6.786,9.58 -6.35,9.144 -5.588,9.144 -5.461,9.017 -5.461,8.255 -4.826,7.62 -3.937,7.62 -3.528,7.211 U1.24
NetC5_2: C5.2 U1.23 X2.3 | length 8.6
  Top Layer w0.2: C5.2 -5.715,13.18 X2.3 -5.08,11.176 -4.826,10.922 -4.826,8.382 -4.445,8.001 -3.684,8.001 -3.028,7.345 U1.23
NetC10_2: C10.2 C11.2 L2.1 U1.30 | length 5.8
  Top Layer w0.2: C10.2 -6.997,6.31 L2.1 -6.985,3.314 U1.30
NetC12_2: C12.2 U1.1 | length 6.3
  Top Layer w0.2: C12.2 -7.266,-2.385 -7.016,-2.135 -7.016,-1.555 -5.207,0.254 -4.064,0.254 -3.528,0.79 U1.1
NetC13_2: C13.2 U1.21 | length 2.3
  Top Layer w0.2: C13.2 -2.028,8.858 U1.21
NetC14_2: C14.2 U1.22 | length 2.8
  Top Layer w0.2: C14.2 -3.507,8.862 -3.257,8.612 -3.257,8.337 -2.528,7.608 U1.22
NetC16_1: C16.1 D3.A L4.2 Q1.3 | length 20.8
  Top Layer w0.5: L4.2 5.112,-18.51 5.809,-17.813 D3.A ; C16.1 7.947,-20.447 7.747,-20.247 D3.A ; Q1.3 17.968,-14.782 17.968,-15.56 17.145,-16.383 8.167,-16.383 7.874,-16.676 7.874,-17.686 D3.A
NetC16_2: C16.2 D1.A D2.K | length 5.3
  Top Layer w0.5: C16.2 9.596,-20.447 9.796,-20.247 9.796,-19.414 10.16,-19.05 D2.K D1.A
NetC30_2: C30.2 L1.2 L5.1 | length 3.3
  Top Layer w0.3: L1.2 L5.1
NetD4_K: D4.K R5.2 | length 1.8
  Top Layer w0.3: R5.2 -11.372,-19.334 -11.372,-21.052 D4.K
NetL1_1: L1.1 U1.19 | length 21.7
  Top Layer w0.2: U1.19 -1.028,7.862 -0.381,8.509 -0.381,18.669 -0.127,18.923 L1.1
NetL2_2: L2.2 L3.1 | length 1.5
  Top Layer w0.2: L3.1 L2.2
NetL3_2: L3.2 U1.31 | length 3.5
  Top Layer w0.2: L3.2 -6.096,1.778 -5.842,2.032 -5.842,2.54 -5.568,2.814 U1.31
NetP3_A5: P3.A5 R7.2 | length 8.5
  Top Layer w0.3: P3.A5 -15.133,-8.91 -14.478,-8.255 -14.478,-4.953 -13.49,-3.965 R7.2 R7.2@-12.088,-4.115
NetP3_B5: P3.B5 R6.2 | length 12.5
  Top Layer w0.3: P3.B5 -15.085,-11.91 -13.843,-10.668 -13.843,-5.588 -13.081,-4.826 -10.59,-4.826 -10.414,-4.65 R6.2
NetQ2_1: Q2.1 R8.2 R9.2 | length 8.5
  Top Layer w0.3: R9.2 R8.2 -18.725,9.723 -18.542,9.906 -14.605,9.906 -14.213,9.514 Q2.1
NetQ2_3: Q2.3 R2.1 | length 6.9
  Top Layer w0.3: R2.1 -20.305,4.333 -19.431,5.207 -18.288,5.207 -17.002,6.493 Q2.3
NetR4_2: R4.2 U3.5 | length 2.7
  Top Layer w0.3: U3.5 -9.32,-13.132 -9.144,-13.308 -9.144,-13.716 -9.353,-13.925 -9.353,-14.532 R4.2
NetR5_1: R5.1 U3.1 | length 13.1
  Top Layer w0.3: R5.1 -12.982,-17.681 -12.065,-16.764 -6.526,-16.764 -6.35,-16.588 -6.35,-13.308 -6.526,-13.132 U3.1
nRST: P1.3 U1.16 | length 10.5
  Top Layer w0.2: U1.16 1.369,5.814 3.175,7.62 6.604,7.62 7.493,8.509 P1.3
RESET: P2.10 U1.13 | length 14.2
  Top Layer w0.2: U1.13@0.672,4.318 4.318,4.318 7.386,1.25 P2.10
RSENSE: P2.3 Q1.2 R3.1 | length 23.1
  Top Layer w0.3: P2.3 16.958,4.75 17.134,4.574 17.134,-10.933 ; R3.1 15.035,-10.933 17.134,-10.933 ; Q1.2 17.134,-10.933
SCL: P2.13 U1.10 | length 14.2
  Top Layer w0.2: U1.10 3.155,2.814 6.219,-0.25 P2.13
SDA: P2.14 U1.8 | length 14.9
  Top Layer w0.2: U1.8 -0.026,1.612 -0.026,1.165 0.377,0.762 4.572,0.762 6.084,-0.75 P2.14
SW_B: SW3.1 SW3.2 U1.26 | length 15.6
  Top Layer w0.2: v1(-13.208,5.842) -11.811,5.842 -10.06,7.593 -6.45,7.593 -5.658,6.801 -5.658,6.181 -4.791,5.314 U1.26
  Bottom Layer w0.2: SW3.2 -14.567,3.975 -13.323,5.219 -13.323,5.727 v1(-13.208,5.842)
SW_L: SW2.1 SW2.2 U1.7 | length 21.9
  Top Layer w0.2: U1.7 -0.528,1.109 0.254,0.327 0.254,-0.899 0.371,-1.016 3.81,-1.016 4.072,-1.278 10.341,-1.278 10.358,-1.295 10.643,-1.295 v1(10.758,-1.41)
  Bottom Layer w0.2: v1(10.758,-1.41) 16.396,-1.41 16.75,-1.764 SW2.2
SW_T: SW1.1 SW1.2 U1.6 | length 7.6
  Top Layer w0.2: U1.6 -1.028,1.002 -0.254,0.228 -0.254,-1.143 1.016,-2.413 v1(1.016,-3.937)
  Bottom Layer w0.3: v1(1.016,-3.937) 2.212,-3.937 SW1.1
SWCLK: P1.2 U1.17 | length 8.4
  Top Layer w0.2: U1.17 -0.028,7.084 0.127,7.239 2.032,7.239 3.429,8.636 4.572,8.636 4.953,9.017 P1.2
SWDIO: P1.1 U1.18 | length 6.7
  Top Layer w0.2: U1.18 -0.528,7.219 -0.127,7.62 1.524,7.62 2.413,8.509 P1.1
TXD: P1.4 U1.15 | length 13.2
  Top Layer w0.2: U1.15 1.631,5.314 3.556,7.239 8.763,7.239 10.033,8.509 P1.4
VBAT: C24.1 C25.1 C29.1 P4.1 R1.2 U2.1 U2.3 U3.3 | length 40.9
  Top Layer w0.3: R1.2 -15.572,0.459 -14.478,-0.635 -10.668,-0.635 -9.271,-2.032 -9.271,-5.715 -9.017,-5.969 -9.017,-6.657 -8.867,-6.807 U2.1 ; C24.1 -12.306,-6.807 -10.795,-6.807 U2.1 ; P4.1 -3.556,-18.288 -3.175,-17.907 -3.175,-11.811 -3.721,-11.265 C29.1 -5.24,-11.232 U3.3 -7.363,-10.29 -7.62,-10.033 -8.509,-10.033 -8.766,-9.776 U2.3 -7.542,-8.707 -7.366,-8.531 -7.366,-7.112 -7.671,-6.807 U2.1
VCOM: C23.2 P2.24 | length 5.1
  Top Layer w0.3: C23.2 12.065,-6.223 12.538,-5.75 P2.24
VDD: C20.2 P2.18 | length 5.1
  Top Layer w0.3: C20.2 8.591,-2.75 P2.18
VGH: C17.1 D3.K P2.21 | length 19.1
  Top Layer w0.3: D3.K 7.659,-14.865 7.659,-13.374 6.731,-12.446 6.731,-9.779 6.528,-9.576 C17.1 5.683,-5.747 7.18,-4.25 P2.21
VGL: C15.1 D2.A P2.23 | length 14
  Top Layer w0.3: D2.A 10.16,-13.081 11.049,-12.192 11.049,-9.906 10.719,-9.576 C15.1 9.938,-6.318 11.006,-5.25 P2.23
VSH1: C21.2 P2.20 | length 14.7
  Top Layer w0.3: C21.2 3.556,-5.715 5.521,-3.75 P2.20
VSH2: C18.2 P2.5 | length 5.1
  Top Layer w0.3: C18.2 8.607,3.75 P2.5
VSL: C22.2 P2.22 | length 10
  Top Layer w0.3: C22.2 7.81,-5.779 8.839,-4.75 P2.22
VUSB: C28.1 D4.A P3.A4/B9 P3.B4/A9 R10.2 U3.4 | length 47.2
  Top Layer w0.3: P3.A4/B9 -16.35,-7.91 -16.927,-7.91 -17.399,-8.382 -17.399,-11.993 -16.972,-12.421 -16.339,-12.421 P3.B4/A9 -13.609,-12.56 -13.596,-12.573 ; U3.4 -11.778,-11.232 C28.1 -13.42,-11.392 -13.596,-11.568 -13.596,-12.573 ; R10.2 -2.004,-10.386 -2.413,-10.795 -2.413,-21.463 -2.921,-21.971 -12.573,-21.971 -12.767,-21.777 -12.767,-21.357 D4.A -14.175,-21.082 -14.351,-20.906 -14.351,-17.018 -13.596,-16.263 -13.596,-12.573
pads on no net: A1.2 P2. P2.1 P2.4 P2.6 P2.7 P2.19 P3. P3.15 P3.16 P3.17 P3.18 P3.A6 P3.A7 P3.A8 P3.B6 P3.B7 P3.B8 U1.28 U2.4

## Polygon pours and split planes (outlines as drawn)
GND on Bottom Layer "GND_L02_P000" (solid, pour order 0): -20.5,-22.5 cw(c-20.5,-20.5) -22.5,-20.5 -22.5,20.5 cw(c-20.5,20.5) -20.5,22.5 20.5,22.5 cw(c20.5,20.5) 22.5,20.5 22.5,-20.5 cw(c20.5,-20.5) 20.5,-22.5
GND on Top Layer "GND_L01_P001" (solid, pour order 1): -2.413,22.499 -2.413,5.715 1.905,5.715 1.778,5.842 1.778,12.827 22.483,12.827 22.479,12.831 22.479,22.479

## Keep-outs
Keep-Out Layer:
  the board outline again, w0.15

## Other copper
Top Layer:
  pour cut-out: 15.875,24.638 15.875,15.875 22.5,15.875 22.5,24.638
Bottom Layer:
  pour cut-out: 15.875,24.003 15.875,15.875 22.5,15.875 22.5,24.003

## Silkscreen, mask and mechanical layers (free items; w line width, h text height)
Top Overlay:
  drawing of 6 lines, arcs and shapes, not listed
  text "eDICE / Rev 1 / 2022-NOV" at -7.366,14.627 h1
  text "SWD / SWC / RST / TXD / 3V3 / GND" at 12.446,6.735 h0.8 r90
  text "B+ / B-" at -4.695,-20.955 h0.8
Bottom Overlay:
  region: 305 vertices and 4 holes, not listed, extent 5.326,-17.017 13.884,-8.127
  text "eDICE / Rev 1 / 2022-NOV" at 3.683,-14.583 h1
  text "SASAKARANOVIC.COM" at 3.683,-16.359 h1
Drill Drawing:
  drawing of 239 lines, arcs and shapes, not listed
  text "Layer" at 60.073,20.256 h1.52
  text "Name" at 70.485,20.256 h1.52
  text "Material" at 94.101,20.256 h1.52
  text "Thickness" at 115.939,20.256 h1.52
  text "Constant" at 132.444,20.256 h1.52
  text "Board Layer Stack" at 146.919,20.256 h1.52
  text "Top Overlay" at 70.485,17.209 h1.52
  text "Top Solder" at 70.485,14.16 h1.52
  text "Solder Resist" at 94.101,14.16 h1.52
  text "0.010mm" at 115.939,14.16 h1.52
  text "3.5" at 132.444,14.16 h1.52
  text "1" at 60.073,11.112 h1.52
  text "Top Layer" at 70.485,11.112 h1.52
  text "0.036mm" at 115.939,11.112 h1.52
  text "Dielectric 1" at 70.485,8.064 h1.52
  text "FR-4" at 94.101,8.064 h1.52
  text "0.900mm" at 115.939,8.064 h1.52
  text "4.8" at 132.444,8.064 h1.52
  text "2" at 60.073,5.016 h1.52
  text "Bottom Layer" at 70.485,5.016 h1.52
  text "0.036mm" at 115.939,5.016 h1.52
  text "Bottom Solder" at 70.485,1.968 h1.52
  text "Solder Resist" at 94.101,1.968 h1.52
  text "0.010mm" at 115.939,1.968 h1.52
  text "3.5" at 132.444,1.968 h1.52
  text "Bottom Overlay" at 70.485,-1.079 h1.52
  text "Total board thickness:" at 60.073,-4.127 h1.52
  text "0.991mm" at 115.939,-4.127 h1.52
  text "Symbol" at 60.303,-10.16 h1.83
  text "Count" at 73.152,-10.16 h1.83
  text "Hole Size" at 88.134,-10.16 h1.83
  text "Plated" at 116.574,-10.16 h1.83
  text "Hole Type" at 129.423,-10.16 h1.83
  text "Via/Pad" at 148.062,-10.16 h1.83
  text "Pad Shape" at 163.044,-10.16 h1.83
  text "92" at 73.152,-13.97 h1.52
  text "0.400mm (15.75mil)" at 88.134,-13.97 h1.52
  text "PTH" at 116.574,-13.97 h1.52
  text "Round" at 129.423,-13.97 h1.52
  text "Via" at 148.062,-13.97 h1.52
  text "Rounded" at 163.044,-13.97 h1.52
  text "2" at 73.152,-17.78 h1.52
  text "0.600mm (23.62mil)" at 88.134,-17.78 h1.52
  text "PTH" at 116.574,-17.78 h1.52
  text "Slot" at 129.423,-17.78 h1.52
  text "Pad" at 148.062,-17.78 h1.52
  text "Rounded" at 163.044,-17.78 h1.52
  text "2" at 73.152,-21.59 h1.52
  text "0.600mm (23.62mil)" at 88.134,-21.59 h1.52
  text "PTH" at 116.574,-21.59 h1.52
  text "Slot" at 129.423,-21.59 h1.52
  text "Pad" at 148.062,-21.59 h1.52
  text "Rounded" at 163.044,-21.59 h1.52
  text "2" at 73.152,-25.4 h1.52
  text "0.650mm (25.59mil)" at 88.134,-25.4 h1.52
  text "NPTH" at 116.574,-25.4 h1.52
  text "Round" at 129.423,-25.4 h1.52
  text "Pad" at 148.062,-25.4 h1.52
  text "Rounded" at 163.044,-25.4 h1.52
  text "4" at 73.152,-29.21 h1.52
  text "3.000mm (118.11mil)" at 88.134,-29.21 h1.52
  text "PTH" at 116.574,-29.21 h1.52
  text "Round" at 129.423,-29.21 h1.52
  text "Pad" at 148.062,-29.21 h1.52
  text "Rounded" at 163.044,-29.21 h1.52
  text "102 Total" at 73.152,-33.02 h1.52
  text "Slot definitions :" at 60.303,-36.702 h1.52
  text "Routed Path Length" at 86.533,-36.702 h1.52
  text "= Calculated from tool start centre position to tool end centre position." at 114.541,-36.702 h1.52
  text "Hole Length" at 86.533,-39.242 h1.52
  text "= Routed Path Length + Tool Size = Slot length as defined in the PCB layout" at 104.13,-39.242 h1.52

## Dimensions
20.5,-22.5 to 20.5,22.5 on Drill Drawing
-22.5,-20.5 to 22.5,-20.5 on Drill Drawing

## Text inside footprints (layer, text, board x,y; h text height)
P3: Mechanical 13 "PCB EDGE" at -23.368,-15.367 h0.41 r270